# Altium PCB pi_powersupply.PcbDoc
Units mm, origin at the board's own origin, x right, y up, seen from the top; angles counter-clockwise.
Board outline 85.22 x 49.15 mm, 2 copper layers (Top Layer, Bottom Layer); 20 components, 10 nets, 79 pads, 9 vias.
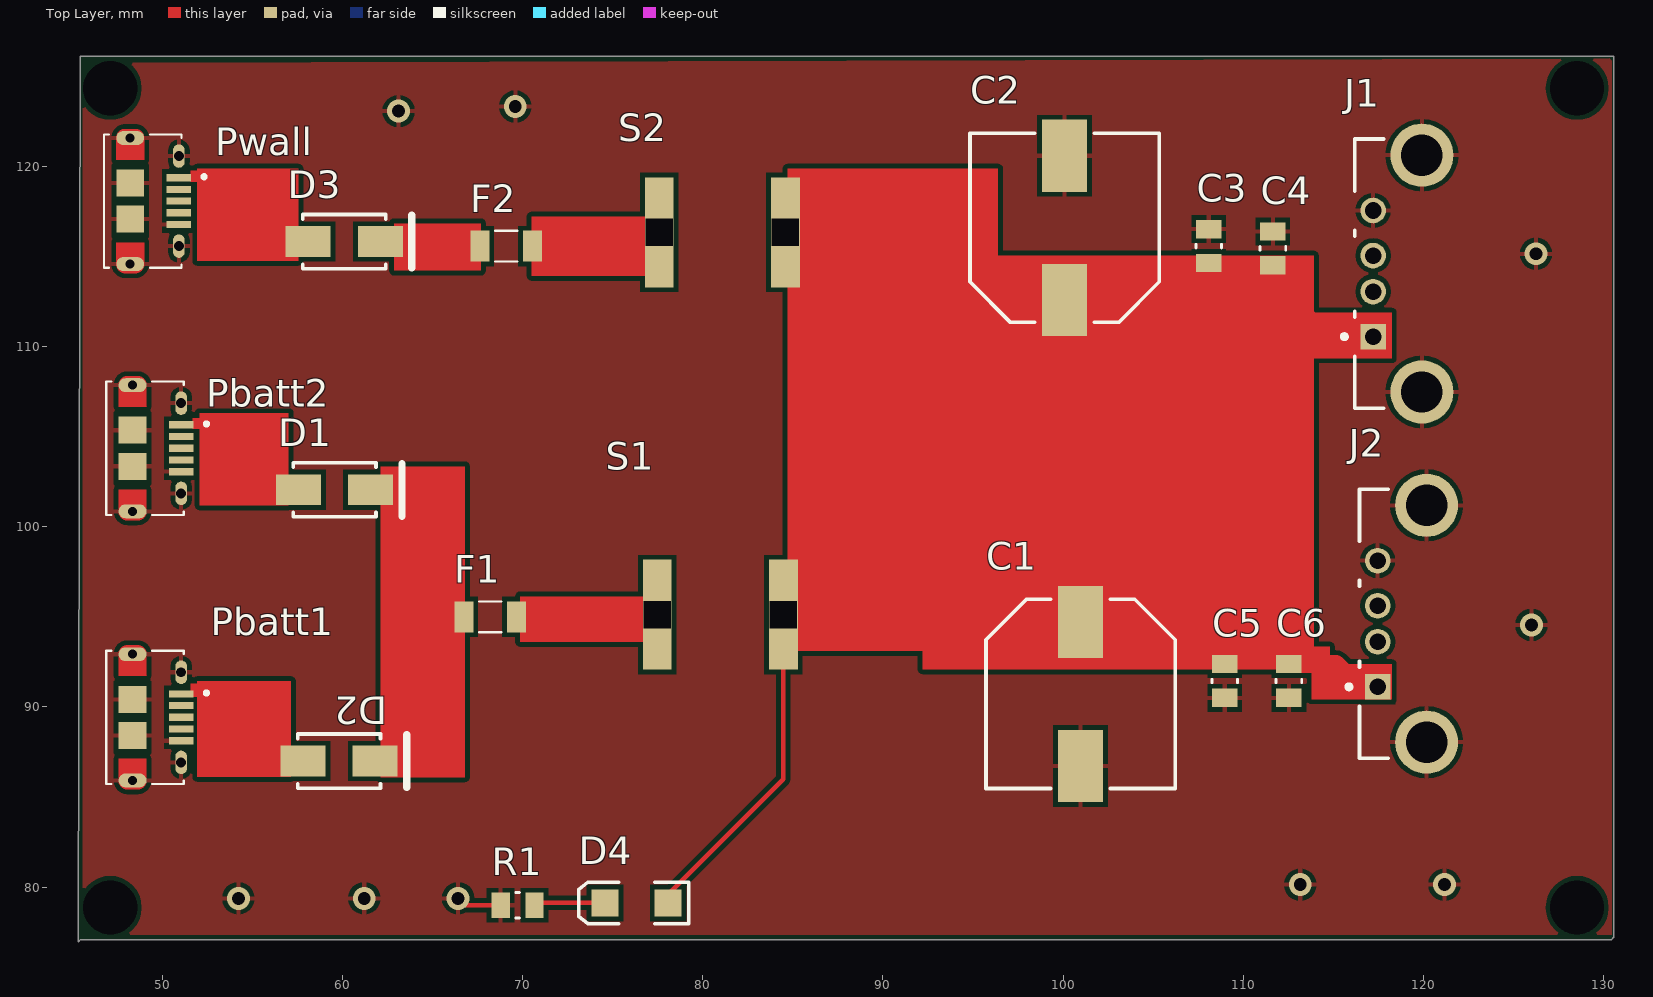
[diagram p0: Top Layer view]
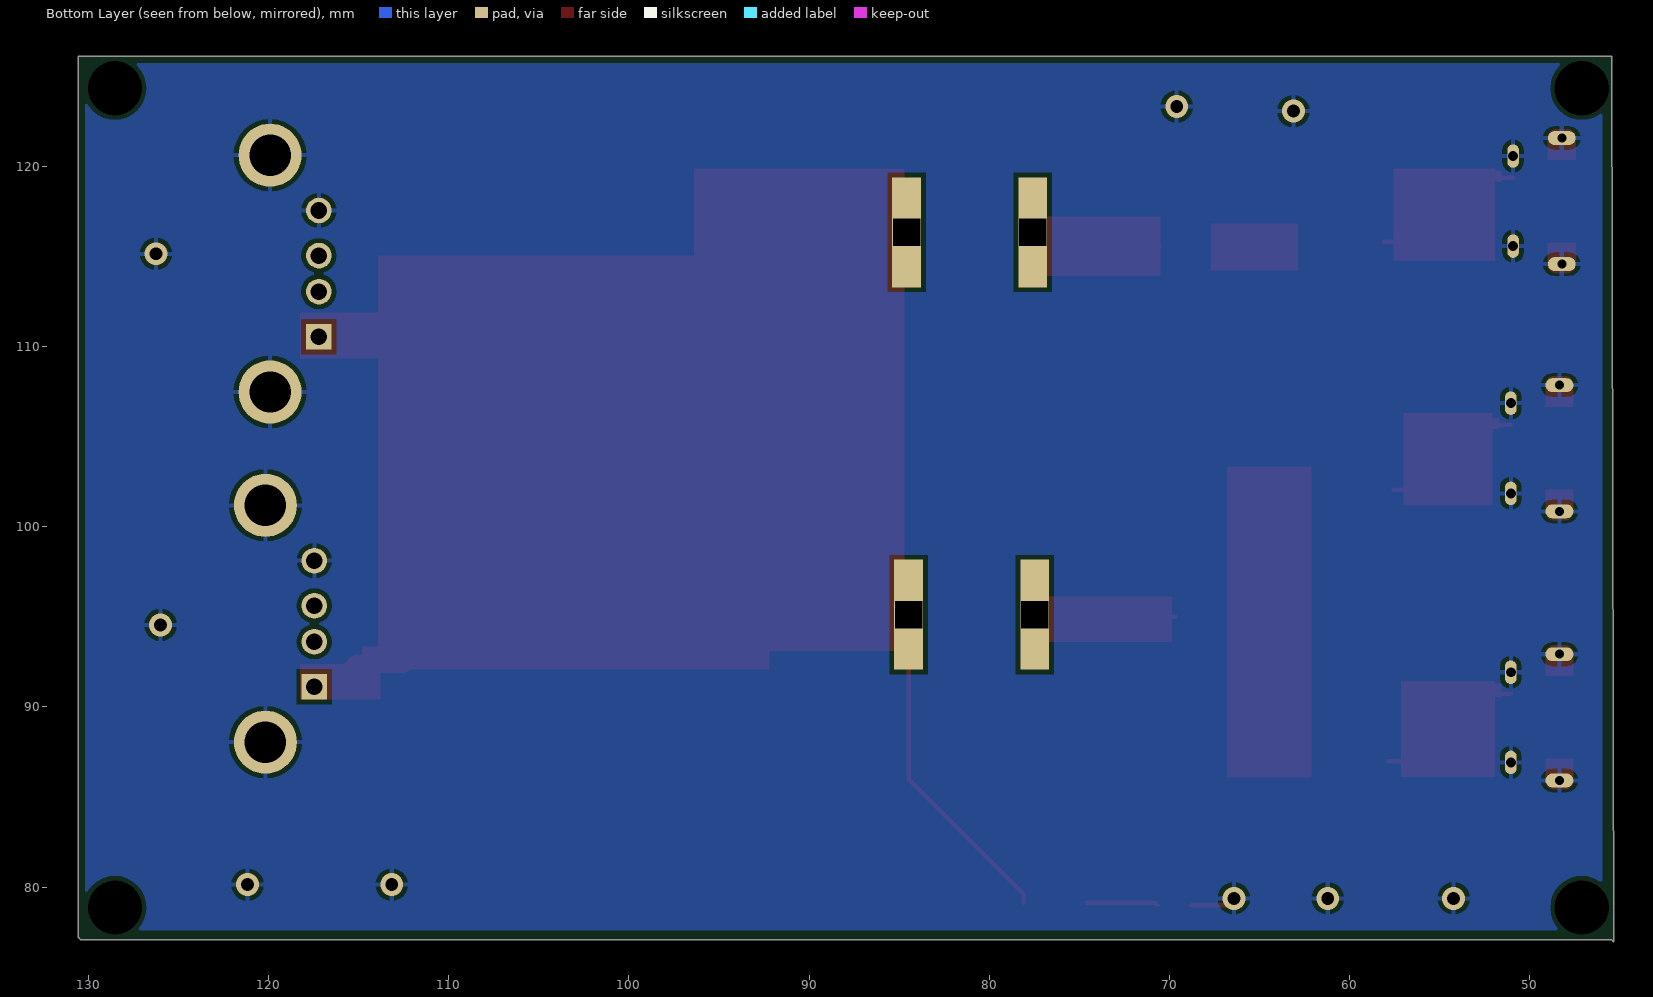
[diagram p1: Bottom Layer view, seen from below]

## Layer stack, top to bottom
Top Solder: solder mask 0.0102, Solder Resist, Dk 3.5
Top Layer: signal copper 0.0356
Dielectric 1: dielectric 0.32, FR-4, Dk 4.8
Bottom Layer: signal copper 0.0356
Bottom Solder: solder mask 0.0102, Solder Resist, Dk 3.5

## Board outline
45.466,126.111 130.556,126.111 130.556,77.216 130.429,77.089 45.466,77.089 45.339,76.962

## Design rules (kind name [scope] priority, off if disabled: settings)
Clearance [All] p1: gap=0.254 ignorepadtopadclearanceinfootprint=FALSE except(0: Arc-Hole Track-Hole SMDPad-Hole THPad-Hole Via-Hole Fill-Hole Poly-Hole Region-Hole Text-Hole)
PolygonConnect [All] p1: connectstyle=Relief reliefconductorwidth=0.254 reliefentries=4 polygonreliefangle="90 Angle" airgapwidth=0.254
RoomDefinition pi_powersupply [InComponentClass('pi_powersupply')] p1: confinementstyle=ConfineIn formatcopy=TRUE lockcomponents=FALSE outline 131.699,78.359 288.798,78.359 288.798,100.33 131.699,100.33
RoutingVias [All] p1: holewidth=0.711 width=1.27 viastyle="Through Hole" minholewidth=0.711 minwidth=1.27 maxholewidth=0.711 maxwidth=1.27
SolderMaskExpansion [All] p1: expansion=0.102
Width [All] p1: maxlimit=0.254 minlimit=0.254 preferedwidth=0.254
30 further rules are at their usual default settings.

## Components (designator, comment, footprint, x,y, rotation, side; value= is the part's Value field where it differs from the comment)
C1 "470uF 25V" NIC-CAPA2-10X10_V 100.965,90.723 r270 top
C2 "470uF 25V" NIC-CAPA2-10X10_V 100.076,116.586 r90 top
C3 "100nF" 0805 108.077,115.57 r270 top
C4 "100nF" 0805 111.633,115.443 r270 top
C5 "100nF" 0805 108.966,91.44 r90 top
C6 "100nF" 0805 112.522,91.44 r90 top
D1 "B340A-13-F" DIOD-SMA-2_V 59.563,102.044 r0 top
D2 "B340A-13-F" DIOD-SMA-2_V 59.817,86.995 r0 top
D3 "B340A-13-F" DIOD-SMA-2_V 60.103,115.824 r0 top
D4 "LED2" 3.2X1.6X1.1 76.327,79.121 r180 top
F1 "Fuse 3A 1206" 1206 68.199,94.996 r0 top
F2 "Fuse 3A 1206" 1206 69.088,115.57 r0 top
J1 "USBA" TE_Connectivity_292303-4_MFG 123.19,114.046 r90 top
J2 "USBA" TE_Connectivity_292303-4_MFG 123.444,94.615 r90 top
Pbatt1 "USBMicro" "USB Micro B Receptacle" 48.364,89.423 r270 top
Pbatt2 "USBMicro" "USB Micro B Receptacle" 48.364,104.354 r270 top
Pwall "USBMicro" "USB Micro B Receptacle" 48.237,118.07 r270 top
R1 "330" 0805 69.723,78.994 r180 top
S1 "SPST 10A 125V" "SWITCH ROCKER SPST 10A 125V" 77.47,95.123 r270 top
S2 "SPST 10A 125V" "SWITCH ROCKER SPST 10A 125V" 77.582,116.332 r270 top

## Footprints (in the part's own frame and the unit in brackets; to place one, negate y for a bottom-side part, rotate by r counter-clockwise, add the part's x,y. Pads: shape width x height; smd on the part's side, far side on the other; paste and mask are expansions set on the pad)
3.2X1.6X1.1 [mm]
  rect 1.5x1.5 smd: 1(-1.75,0) 2(1.75,0)
  silkscreen extent -2.9,-1.15 3.2,1.15
0805 [mil]
  rect 40x55 smd: 1(-37,0) 2(37,0)
  silkscreen extent -4,-28 4,28
1206 [mm]
  rect 1.05x1.72 smd: 1(-1.46,0) 2(1.46,0)
  silkscreen extent -0.62,-0.85 0.62,0.85
DIOD-SMA-2_V [mm] "Molded Diode, 2-Leads, Body 4.6x2.92mm"
  rect 2.5x1.7 smd: 1(-2,0) 2(2,0)
  silkscreen extent -2.3,-1.5 3.75,1.5, body extent -2.52,-1.46 2.52,1.46, height 2.4
NIC-CAPA2-10X10_V [mm] "Aluminum Electrolytic Capacitor, Diameter 10mm, Height 10.8mm, Pitch 8mm"
  rect 4x2.5 smd: 1(-4,0) 2(4,0)
  silkscreen extent -5.25,-5.25 5.25,5.25, body extent -4.96,-4.99 5,4.99, height 10.8
"SWITCH ROCKER SPST 10A 125V" [mm]
  rect 6.1x1.6 hole 1.5 square: 0(0,0) 1(0,7)
  body extent -7.3,-3.1 7.3,15.9, height 13.69
TE_Connectivity_292303-4_MFG [mm]
  rect 1.42x1.42 hole 0.92 paste-1000 mask+0: 1(-3.5,5.99)
  round 1.42 hole 0.92 paste-1000 mask+0: 2(-1,5.99) 3(1,5.99) 4(3.5,5.99)
  round 3.5 hole 2.3 paste-1000 mask+0: 5(-6.57,3.28) 6(6.57,3.28)
  silkscreen extent -7.47,5.4 7.47,7.71, body extent -8.42,-7.1 8.42,7.1, height 0.25
"USB Micro B Receptacle" [mm] "CONN RCPT USB2.0 MICRO B SMD R/A"
  rect 0.4x1.35 smd: 1(-1.3,2.69) 2(-0.65,2.69) 3(0,2.69) 4(0.65,2.69) 5(1.3,2.69)
  oval 1.3x0.65 hole 0.55: S1(-2.5,2.69) S2(2.5,2.69)
  oval 0.775x1.55 hole 0.5: S3(-3.5,-0.01) S6(3.5,-0.01)
  rect 1.5x1.55 smd: S4(-1,-0.01) S5(1,-0.01)
  Top Layer region: 194 vertices and 0 holes, not listed, extent -4,-0.785 -2.3,0.77
  Top Layer region: 194 vertices and 0 holes, not listed, extent 2.3,-0.79 4,0.765
  silkscreen extent -3.7,-1.46 3.7,4.19, body extent -4,-2.74 4.04,2.79, height 2.87

## Part data
C1 C2: library part CMP-0687-00002-1, "Aluminum Electrolytic Capacitor, UD Series, Low Impedance, 470 uF, 25 V, + / - 20%, -55 to 105 degC, Chip Type, 10 x 10 mm D x L, Pb-Free, Reel", Manufacturer=Nichicon, PartNumber=UUD1E471MNL1GS, Rated Capacitance="470 uF", Rated Ripple Current (at 100kHz)="670 mA", Rated Voltage="25 V", Tolerance Rated Capacitance="-20 to 20%", ComponentLink1Description="Manufacturer URL", ComponentLink1URL=http://www.nichicon.co.jp/, ComponentLink2Description=Datasheet, ComponentLink2URL=http://products.nichicon.co.jp/en/pdf/XJA043/e-ud.pdf, ComponentLink3Description="Package Specification", ComponentLink3URL=http://products.nichicon.co.jp/en/pdf/XJA043/e-ud.pdf, DatasheetVersion=08/2012, Diameter="10 mm", Digikey=493-6386-2-ND, Endurance Time="5000 h", Impedance="0.09 Ohm", Length="10 mm", Mounting Technology="Surface Mount", PackageDescription="2-Pin Surface Mount Device, Diameter 10 mm, Height 10 mm, Pitch 8 mm", PackageReference=CAPAE-D10H10, Packing="Dia382mm Reel", RoHS=TRUE
C3 C4 C5 C6: library part "CAP 100nF 0805", "CAP CER 0.1UF 50V X7R 0805", Package=0805, Rating=50V, Tolerance=10%, Digikey=311-1140-1-ND, Digikey Link=https://www.digikey.ca/products/en?keywords=311-1140-1-ND, MF=Yageo, MP=CC0805KRX7R9BB104, Price="0,119 CAD"
D1 D2 D3: library part CMP-1667-00003-1, "Surface Mount Schottky Barrier Rectifier, 40 V, 3 A, -55 to 150 degC, 2-Pin SMA, RoHS, Tape and Reel", Case\Package=SMA, Forward Current="3 A", Forward Voltage="500 mV", Max Operating Temperature="125 degC", Max Surge Current="80 A", Min Operating Temperature="-55 degC", Package Quantity=5000, Peak Reverse Current="500 uA", ComponentLink1Description="Manufacturer URL", ComponentLink1URL=http://www.diodes.com/, ComponentLink2Description=Datasheet, ComponentLink2URL=http://www.diodes.com/_files/datasheets/ds30891.pdf, DatasheetVersion="Rev. 17 - 2, 09/2015", Elements=1, Height="2.1 mm", Length="4.6 mm", Mount="Surface Mount", Mounting Technology="Surface Mount", PackageDescription="2-Pin Surface Mounted Assembly, Body 4.3 x 2.605 mm, Height 2.4 mm", PackageReference=SMA-2, Packaging="Tape and Reel", Pins=2, Radiation Hardening=No, REACH SVHC="No SVHC", RoHSCompliant=true, Width="2.92 mm"
D4: library part "LED RED SMD", "Typical RED, GREEN, YELLOW, AMBER GaAs LED", Package=0603, Rating=1.8V, Digikey=160-1181-1-ND, Digikey Link=https://www.digikey.ca/products/en?keywords=160-1181-1-ND, MF="Lite-On Inc.", MP=LTST-C190CKT
F1 F2: "FUSE 3.0A 63VAC/DC SLOW 1206", Rating=3A, Digikey=507-1896-6-ND, Digikey Link=https://www.digikey.ca/product-detail/en/bel-fuse-inc/0685T3000-01/507-1896-6-ND/4968212, MF="Bel Fuse Inc.", MP=0685T3000-01
J1 J2: library part CMP-03205-00081-1, "CONN RCPT USB2.0 TYPEA 4POS R/A", Current Rating=1A, Manufacturer="TE Connectivity", Package=292303-4, Temperature="-55°C to +85°C", Temperature Range High=+85°C, Temperature Range Low=-55°C, Voltage Rating=30V, Automotive=No, ComponentLink1Description=Datasheet, ComponentLink1URL=https://www.te.com/usa-en/product-292303-4.html?te_bu=Cor&te_type=other&te_campaign=oct_glo_cor-oct-global-oth-prtnr-fy19-oct-octo-buy-bom_sma-298_2&elqCampaignId=35216, Conn Orientation="Right Angle", Contact Material=Gold,Nickel, Is Female=yes, Lead Free=Yes, Number Of Contacts=4, Part Number=292303-4, RoHS=TRUE, Shielding=true, Usb Standard="USB 2.0"
Pbatt1 Pbatt2 Pwall: library part "USB Micro B Receptacle", "USB - micro B USB 2.0 Receptacle Connector 5 Position Surface Mount, Right Angle; Through Hole", Rating="100VAC 1.8A", ComponentLink1Description=Digikey, ComponentLink1URL=https://www.digikey.ca/product-detail/en/amphenol-icc-fci/10118194-0001LF/609-4618-1-ND/2785382, ComponentLink2Description=Datasheet, ComponentLink2URL=https://www.digikey.ca/en/datasheets/amphenol-fci/amphenol-fci-io-usb-micro, Digikey=609-4618-1-ND, Digikey Link=https://www.digikey.ca/product-detail/en/amphenol-icc-fci/10118194-0001LF/609-4618-1-ND/2785382, MF="Amphenol ICC (FCI)", MP=10118194-0001LF, Price="0.62000 CAD"
R1: library part "RES 330 0805", "RES SMD 330 OHM 1% 1/8W 0805", Package=0805, Rating=0.125W, Digikey=311-330CRCT-ND, Digikey Link=https://www.digikey.ca/products/en?keywords=311-330CRCT-ND, MF=Yageo, MP=RC0805FR-07330RL, Price="0.061 CAD"
S1 S2: library part "SW ROCKER", "Rocker Switch SPST 10A (AC) 125V Panel Mount, Snap-In", Rating="10A 125V", ComponentLink1Description=Digikey, ComponentLink1URL=https://www.digikey.ca/product-detail/en/zf-electronics/SRB22A2FBBNN/CH755-ND/446021, ComponentLink2Description=Datasheet, ComponentLink2URL=http://switches-sensors.zf.com/us/wp-content/uploads/sites/7/2012/10/Rocker_SRB_Datasheet1.pdf, Digikey=CH755-ND, Digikey Link=https://www.digikey.ca/product-detail/en/zf-electronics/SRB22A2FBBNN/CH755-ND/446021, MF="ZF Electronics", MP=SRB22A2FBBNN, Price="1.276 CAD"

## Free pads (board coordinates)
  round 1.524 hole 3: 6(47.117,78.867) 6(47.117,124.333) 6(128.524,78.867) 6(128.524,124.333)

## Via types
v1: diameter 1.27, hole 0.711, Top Layer to Bottom Layer, 9 vias

## Nets (pads, with @x,y where several pads share a name; then routed paths per layer and width w, separated by ;. In a path a pad name is that pad's centre, name@x,y a point inside that pad or via, vN(x,y) a via of type N, cw(c..) or ccw(c..) an arc to the next point about the centre after c; other vN are vias at no path point)
GND: C1.2 C2.2 C3.1 C4.1 C5.1 C6.1 J1.4 J1.5 J1.6 J2.4 J2.5 J2.6 Pbatt1.5 Pbatt1.S1 Pbatt1.S2 Pbatt1.S3 Pbatt1.S4 Pbatt1.S5 Pbatt1.S6 Pbatt2.5 Pbatt2.S1 Pbatt2.S2 Pbatt2.S3 Pbatt2.S4 Pbatt2.S5 Pbatt2.S6 Pwall.5 Pwall.S1 Pwall.S2 Pwall.S3 Pwall.S4 Pwall.S5 Pwall.S6 R1.2 | length 2.5
  Top Layer w0.254: v1(66.421,79.375) 66.802,78.994 R1.2
  other v1: 54.229,79.375 61.214,79.375 113.157,80.137 121.158,80.137 125.984,94.549 126.238,115.145 63.119,123.063 69.596,123.317
NetD1_2: D1.2 D2.2 F1.1
NetD3_1: D3.1 Pwall.1 | length 8.6
  Top Layer w0.254: Pwall.1 52.588,119.37 56.134,115.824 D3.1
NetD3_2: D3.2 F2.1
NetD4_2: D4.2 R1.1 | length 4
  Top Layer w0.254: R1.1 70.79,79.121 D4.2
NetF1_2: F1.2 S1.0 | length 7.9
  Top Layer w0.254: F1.2 77.343,94.996 S1.0
NetF2_2: F2.2 S2.0 | length 7.3
  Top Layer w0.254: F2.2 76.82,115.57 S2.0
Vbatt1: D1.1 Pbatt2.1 | length 9.1
  Top Layer w0.254: Pbatt2.1 52.69,105.654 56.3,102.044 D1.1 ; D1.1@56.442,102.054 D1.1@57.563,102.054
Vbatt2: D2.1 Pbatt1.1 | length 3
  Top Layer w0.254: Pbatt1.1 53.04,90.723 ; D2.1@56.768,86.995 D2.1
Vcc: C1.1 C2.1 C3.2 C4.2 C5.2 C6.2 D4.1 J1.1 J2.1 S1.1 S2.1 | length 108
  Top Layer w0.254: D4.1 78.077,79.601 84.47,85.994 S1.1 C1.1@100.565,95.123 ; S2.1 91.186,116.332 94.932,112.586 C2.1 ; C1.1@100.765,94.923 C1.1@100.565,95.123 ; C1.1 102.889,94.723 105.232,92.38 C5.2 C6.2 ; 111.633,113.538 C4.2 108.204,114.503 C3.2 106.883,114.63 104.839,112.586 C2.1 ; C2.1 100.076,95.612 C1.1@100.565,95.123
  Top Layer w1: 111.633,113.538 114.625,110.546 J1.1 ; C6.2 115.138,92.38 116.403,91.115 J2.1
pads on no net: J1.2 J1.3 J2.2 J2.3 Pbatt1.2 Pbatt1.3 Pbatt1.4 Pbatt2.2 Pbatt2.3 Pbatt2.4 Pwall.2 Pwall.3 Pwall.4

## Polygon pours and split planes (outlines as drawn)
GND on Top Layer (solid, pour order 10): 45.593,125.73 45.593,77.343 130.429,77.343 130.429,125.857 130.302,125.984
no net on Top Layer "Top Layer-No Net" (solid, pour order 2): 126.746,123.698
GND on Bottom Layer "Bottom Layer-GND" (solid, pour order 8): 45.974,125.73 45.974,77.597 130.175,77.597 130.175,125.603 130.302,125.73

## Other copper
Top Layer:
  rectangle net NetD3_2: 62.865,114.207 67.691,116.84
  rectangle net NetD3_1: 51.943,114.737 57.563,119.888
  rectangle net NetD3_1: 51.562,119.126 52.69,119.761
  rectangle net Vbatt1: 52.07,101.185 57.023,106.299
  rectangle net Vbatt1: 51.689,105.41 53.213,106.045
  rectangle net NetD1_2: 62.103,86.081 66.802,103.354
  rectangle net Vbatt2: 51.943,86.109 57.15,91.44
  rectangle net NetF2_2: 70.485,113.919 77.724,117.221
  rectangle net Vcc: 113.538,91.923 114.808,93.345
  rectangle net Vcc: 113.792,90.424 118.237,92.38
  rectangle net Vcc: 113.157,109.347 118.237,111.887
  rectangle net Vcc: 92.202,92.075 113.919,115.046
  rectangle net Vcc: 84.709,93.091 96.393,119.888
  rectangle net NetF1_2: 69.85,93.599 77.343,96.139
  rectangle net Vbatt2: 51.562,90.551 53.721,91.313

## Text inside footprints (layer, text, board x,y; h text height)
Pbatt1: Mechanical 13 "PCB END" at 46.004,91.373 h1.88 r270; Mechanical 13 "PCB END" at 46.004,91.373 h1.88 r270
Pbatt2: Mechanical 13 "PCB END" at 46.004,106.304 h1.88 r270; Mechanical 13 "PCB END" at 46.004,106.304 h1.88 r270
Pwall: Mechanical 13 "PCB END" at 45.877,120.02 h1.88 r270; Mechanical 13 "PCB END" at 45.877,120.02 h1.88 r270